# Altium PCB LedDimming_V2_SMD_Only.PcbDoc
Units mm, origin at the board's own origin, x right, y up, seen from the top; angles counter-clockwise.
Board outline 47.75 x 10.16 mm, 2 copper layers (Top Layer, Bottom Layer); 21 components, 17 nets, 59 pads, 8 vias.
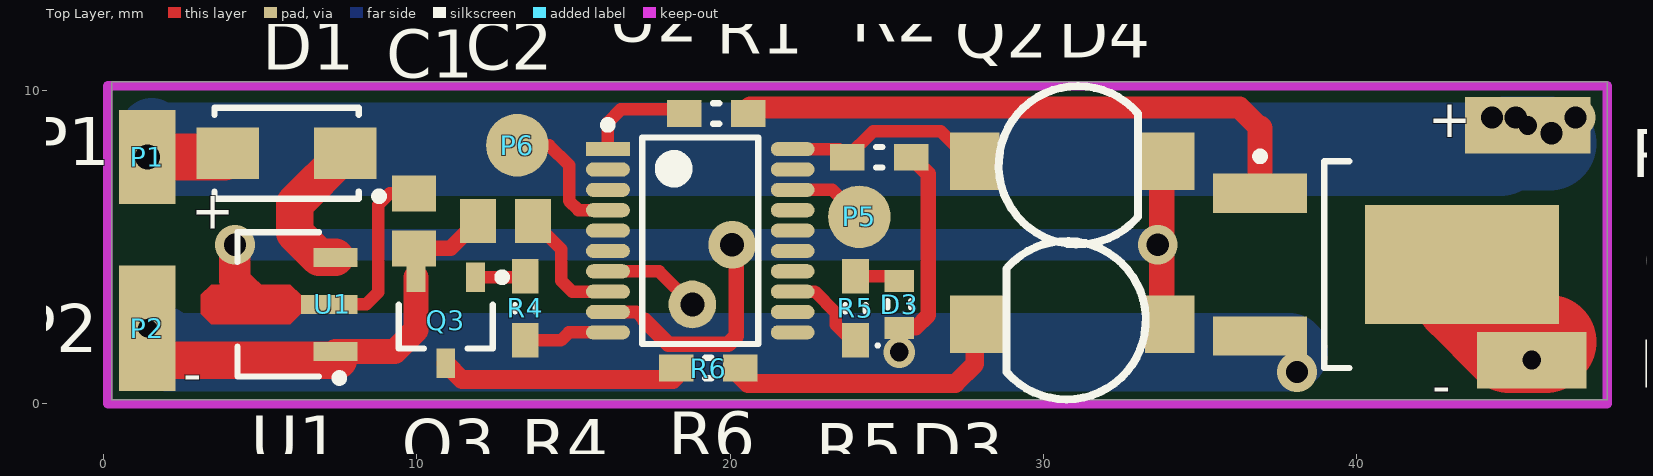
[diagram p0: Top Layer view]
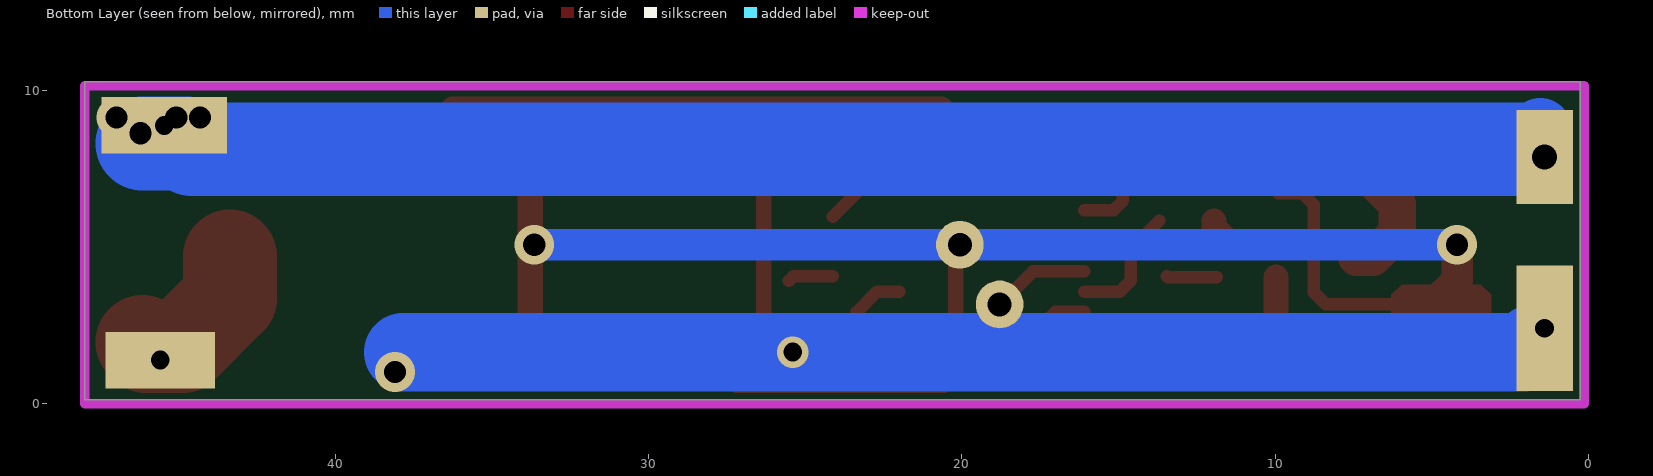
[diagram p1: Bottom Layer view, seen from below]

## Layer stack, top to bottom
Top Solder: solder mask 0.0102, Solder Resist, Dk 3.5
Top Layer: signal copper 0.0356
Dielectric 1: dielectric 0.32, FR-4, Dk 4.8
Bottom Layer: signal copper 0.0356
Bottom Solder: solder mask 0.0102, Solder Resist, Dk 3.5

## Board outline
0.254,0.127 48.006,0.127 48.006,10.287 0.254,10.287

## Design rules (kind name [scope] priority, off if disabled: settings)
Clearance [All] p1: gap=0.2 ignorepadtopadclearanceinfootprint=FALSE
PolygonConnect [All] p1: connectstyle=Relief reliefconductorwidth=0.254 reliefentries=4 polygonreliefangle="90 Angle" airgapwidth=0.254
RoutingVias [All] p1: holewidth=0.4 width=8 viastyle="Through Hole" minholewidth=0.711 minwidth=1.27 maxholewidth=0.711 maxwidth=1.27
SolderMaskExpansion [All] p1: expansion=0.102
Width [All] p1: maxlimit=4 minlimit=0.4 preferedwidth=0.5
30 further rules are at their usual default settings.

## Components (designator, comment, footprint, x,y, rotation, side; value= is the part's Value field where it differs from the comment)
C1 "106" CAPC2012X12N 9.906,5.842 r90 top
C2 "104" CAPC2012X12N 12.827,5.842 r0 top
D1 "1N4007" SODFL504X244-2N 5.842,8.001 r180 top
D3 "LED0603" DIOC1608X06N 25.4,3.175 r90 top
D4 "LED IR 3mm" "LED_IR_3mm-SMD- Modifire" 32.258,2.667 r180 top
P1 "P" Point#1 1.397,7.874 r0 top
P2 "P" Point#2 1.397,2.413 r0 top
P3 "P" Point#3 45.593,1.397 r0 top
P4 "P" Point#4 45.466,8.89 r0 top
P5 "P" Point#5 24.13,5.969 r0 top
P6 "P" Point#5 13.208,8.255 r0 top
Q1 "AOD424" DPAK228P991X229-3N_TO252 41.021,4.445 r0 top
Q2 "LED IR 3mm" "LED_IR_3mm-SMD- Modifire" 29.591,7.62 r0 top
Q3 "C1815" SOT95P278X125-3N 10.922,2.667 r270 top
R1 "470R" RESC2608X06N_0603 19.558,9.271 r180 top
R2 "10K" RESC2608X06N_0603 24.765,7.874 r180 top
R4 "1K" RESC2608X06N_0603 13.462,3.048 r90 top
R5 "1K" RESC2608X06N_0603 24.003,3.048 r270 top
R6 "100R" RESC2608X06N_0603 19.304,1.143 r0 top
U1 "CJA1117B-5.0 SOT89" SOT89-150P409X160-3N 5.599,3.175 r180 top
U2 "STM8S003" TSOP65P640X120-20N 19.05,5.207 r0 top value=STM8S003F3

## Footprints (in the part's own frame and the unit in brackets; to place one, negate y for a bottom-side part, rotate by r counter-clockwise, add the part's x,y. Pads: shape width x height; smd on the part's side, far side on the other; paste and mask are expansions set on the pad)
CAPC2012X12N [mm] "Chip Capacitor, 2-Leads, Body 2.00x1.25mm, IPC Medium Density"
  rect 1.15x1.4 smd: 1(-0.875,0) 2(0.875,0)
  body extent -1.1,-0.67 1.1,0.67, height 1.2
DIOC1608X06N [mm] "Chip Diode, 2-Leads, Body 1.60x0.80mm, IPC Medium Density"
  rect 0.7x0.95 smd: 1(-0.75,0) 2(0.75,0)
  silkscreen extent -1.36,-0.38 0.1,0.74, body extent -0.9,-0.4 0.9,0.4, height 0.6
DPAK228P991X229-3N_TO252 [mm] "D-PAK, 3-Pads, Body 6.15x6.65mm (max), IPC Medium Density"
  rect 3x1.25 smd: 1(-4.1,2.28) 3(-4.1,-2.28)
  rect 6.2x3.8 smd: 4(2.35,0)
  silkscreen extent -4.22,-3.3 -1.25,3.58, body extent -2.05,-3.3 4.05,3.3, height 2.29
"LED_IR_3mm-SMD- Modifire" [mil] "IR Transmitter and Receiver Led"
  rect 71.81x71.81 smd: 1(170,5)
  rect 62.3x71.81 smd: 2(-70,5)
  silkscreen extent -40,-100 135,100
Point#1 [mm]
  rect 1.8x3 hole 0.8: 1(0,0)
Point#2 [mm]
  rect 1.8x4 hole 0.6: 1(0,0)
Point#3 [mm]
  rect 3.5x1.8 hole 0.6: 1(0,0)
Point#4 [mm]
  rect 4x1.8 hole 0.6: 1(0,0)
Point#5 [mm]
  round 2 smd: 1(0,0)
RESC2608X06N_0603 [mm] "Chip Resistor, 2-Leads, Body 2.60x0.80mm, IPC Medium Density"
  rect 1.1x0.85 smd: 1(-1.025,0) 2(1.025,0)
  silkscreen extent -0.1,-0.33 0.1,0.33, body extent -1.3,-0.4 1.3,0.4, height 0.6
SODFL504X244-2N [mm] "SODFL, 2-Leads, Body 2.70x5.04mm, IPC Medium Density"
  rect 2x1.65 smd: 1(-1.875,0) 2(1.875,0)
  silkscreen extent -3.08,-1.45 2.3,1.5, body extent -2.3,-1.45 2.3,1.45, height 2.44
SOT89-150P409X160-3N [mm] "SOT89, 3-Leads, Body 4.50x2.45mm, Pitch 1.50mm, Lead Span 4.1mm, IPC Medium Density"
  rect 1.4x0.6 smd: 1(-1.8,1.5) 3(-1.8,-1.5)
  rect 1.8x0.6 smd: 2(-1.6,0)
  Top Layer region: -0.7,0.3 -0.365,0.635 2.165,0.635 2.5,0.3 2.5,-0.3 2.165,-0.635 -0.365,-0.635 -0.7,-0.3
  silkscreen extent -2.05,-2.3 1.32,2.47, body extent -1.28,-2.3 1.32,2.3, height 1.6
SOT95P278X125-3N [mm] "SOT23, 3-Leads, Body 2.92x2.78mm, Pitch 0.95mm, IPC Medium Density"
  rect 0.95x0.6 smd: 1(-1.375,0.95) 2(-1.375,-0.95) 3(1.375,0)
  silkscreen extent -1.5,-1.5 0.9,1.93, body extent -0.9,-1.52 0.9,1.52, height 1.25
TSOP65P640X120-20N [mm] "TSOP, 20-Leads, Body 6.50x4.40mm, Pitch 0.65mm, IPC Medium Density"
  rect 1.4x0.45 smd: 1(-2.95,2.925)
  oval 1.4x0.45 smd: 2(-2.95,2.275) 3(-2.95,1.625) 4(-2.95,0.975) 5(-2.95,0.325) 6(-2.95,-0.325) 7(-2.95,-0.975) 8(-2.95,-1.625) 9(-2.95,-2.275) 10(-2.95,-2.925) 11(2.95,-2.925) 12(2.95,-2.275) 13(2.95,-1.625) 14(2.95,-0.975) 15(2.95,-0.325) 16(2.95,0.325) 17(2.95,0.975) 18(2.95,1.625) 19(2.95,2.275) 20(2.95,2.925)
  silkscreen extent -3.07,-3.3 1.85,3.82, body extent -3.2,-3.3 3.2,3.3, height 1.2

## Part data
C1: library part "Capacitor 106"
C2: library part "Capacitor 104 0603"
D1: library part "1N4007_SMD Diode", "1N4007_SMD"
P1 P2 P3 P4 P5 P6: library part Point
Q1: library part "AOD424 20V N-Channel MOSFET", "AOD424 20V N-Channel MOSFET"
Q3: library part "Transitor C1815 NPN", "SOT-23 Plastic-Encapsulate Transistors"
R1: library part R470_0603_5%, "Thick Film Resistors - SMD 470 ohm 5%", Supplier Part Number 1=CR0603-JW-471ELFCT-ND, Supplier 1=Digi-Key
R2: library part R10k_0603_5%, "RES SMD 10K OHM 1% 1/4W 0603", Supplier Part Number 1=541-10.0KSCT-ND, Supplier 1=Digi-Key
R4 R5: library part 1k_0603_5%, "Thick Film Resistors - SMD 0603 1kOHMS 5% 1/10WATT", Supplier Part Number 1=CR0603-JW-101ELFCT-ND, Supplier 1=Digi-Key
R6: library part R100_0603_5%, "Thick Film Resistors - SMD 0603 100OHMS 5% 1/10WATT", Supplier Part Number 1=CR0603-JW-101ELFCT-ND, Supplier 1=Digi-Key
U1: "CJA1117B-5.0 SOT89 Power IC 1A 5V_IC"
U2: "MCU 8-bit STM8S STM8 CISC 8KB Flash 3.3V/5V 20-Pin TSSOP T/R", Supplier Part Number 1=497-18051-1-ND

## Free pads (board coordinates)
  round 1.524 hole 0.762: 2(20.066,5.08) 3(18.796,3.175)

## Via types
v1: diameter 1.27, hole 0.711, Top Layer to Bottom Layer, 7 vias
v2: diameter 1, hole 0.6, Top Layer to Bottom Layer, 1 vias

## Nets (pads, with @x,y where several pads share a name; then routed paths per layer and width w, separated by ;. In a path a pad name is that pad's centre, name@x,y a point inside that pad or via, vN(x,y) a via of type N, cw(c..) or ccw(c..) an arc to the next point about the centre after c; other vN are vias at no path point)
GND: C1.1 C2.1 D3.1 P2.1 pad.3 Q1.3 Q3.2 R2.1 U1.1 U2.7 | length 59.8
  Top Layer w0.4: U2.7 17.739,4.232 pad.3 ; v2(25.4,1.651) D3.1
  Top Layer w0.5: C1.1 11.077,4.967 C2.1 ; D3.1 25.92,2.425 26.325,2.83 26.325,7.339 R2.1
  Top Layer w0.8: U1.1 9.295,1.675 9.972,2.352 Q3.2 ; C2.1@11.952,5.602 C2.1
  Top Layer w1.2: P2.1@1.535,1.905 2.043,1.397 U1.1@7.493,1.397
  Bottom Layer w2.5: P2.1@1.789,1.905 2.043,1.651 v2(25.4,1.651) 37.846,1.651
  other v1: 38.1,1.016
NetC2_2: C2.2 U2.8 | length 3.9
  Top Layer w0.4: C2.2 14.605,4.939 14.605,3.937 14.96,3.582 U2.8
NetD1_1: D1.1 U1.3 | length 4.9
  Top Layer w1.2: U1.3 6.882,4.675 6.096,5.461 6.096,6.38 D1.1 D1.1@7.728,8.012
NetD3_2: D3.2 R5.1 | length 1.5
  Top Layer w0.4: R5.1@24.13,4.073 25.379,4.073 D3.2@25.527,3.925
NetD4_1: D4.1 R6.2 | length 9.1
  Top Layer w0.6: R6.2@20.329,0.889 20.568,0.65 27.193,0.65 27.813,1.27 D4.1@27.813,2.54
NetP3_1: P3.1 Q1.4 | length 4.8
  Top Layer w3: Q1.4@43.371,4.699 Q1.4 43.371,3.365 44.886,1.85 46.029,1.85 P3.1@46.156,1.977
NetQ1_1: Q1.1 R1.1 | length 18.2
  Top Layer w0.7: R1.1@20.583,9.398 20.645,9.46 36.26,9.46 36.921,8.799
  Top Layer w0.8: Q1.1@36.921,7.233 36.921,8.799
NetQ2_2: Q2.2 R2.2 U2.20 | length 6.5
  Top Layer w0.4: U2.20 23.482,8.132 R2.2 24.576,8.71 26.723,8.71 Q2.2@27.686,7.747
NetQ3_1: Q3.1 R4.2 | length 1.6
  Top Layer w0.4: Q3.1 13.431,4.042 R4.2
NetQ3_3: Q3.3 R6.1 | length 7.6
  Top Layer w0.6: Q3.3 11.437,0.777 18.167,0.777 R6.1@18.279,0.889
NetR1_2: R1.2 U2.1 | length 3.5
  Top Layer w0.4: U2.1 16.1,8.988 16.51,9.398 R1.2@18.533,9.398
NetR4_1: R4.1 U2.10 | length 2.7
  Top Layer w0.4: R4.1 14.596,2.023 14.855,2.282 U2.10
NetR5_2: R5.2 U2.13 | length 2.8
  Top Layer w0.4: U2.13 22.709,3.582 23.368,2.923 23.368,2.531 R5.2@23.876,2.023
RESET: P6.1 U2.4 | length 4.4
  Top Layer w0.4: P6.1 14.224,8.255 14.859,7.62 14.859,6.477 15.154,6.182 U2.4
SWIM: P5.1 U2.18 | length 2.5
  Top Layer w0.4: U2.18 23.267,6.832 P5.1
VCC_5V: C1.2 D4.2 pad.2 Q2.1 U1.2 U2.9 | length 52.6
  Top Layer w0.4: 4.953,3.175 U1.2 8.382,3.175 8.763,3.556 8.763,6.35 9.13,6.717 C1.2 ; U2.9 17.007,2.932 17.272,2.667
  Top Layer w0.5: 17.272,2.667 18.034,1.905 19.939,1.905 20.193,2.159 20.193,4.953 pad.2
  Top Layer w0.8: Q2.1@33.782,7.747 33.782,2.667 D4.2@33.909,2.54
  Top Layer w1: v1(4.191,5.08) 4.191,3.937 4.953,3.175
  Bottom Layer w1: v1(4.191,5.08) pad.2 v1(33.655,5.08)
VCC_12V: D1.2 P1.1 P4.1 | length 47.6
  Top Layer w1.5: P1.1 3.84,7.874 D1.2
  Bottom Layer w2: P1.1@1.535,8.763 P1.1@2.17,8.128
  Bottom Layer w3: P1.1@2.17,8.128 44.577,8.128 44.759,8.31 P4.1@46.156,8.31
  other v1: 46.228,8.636 44.323,9.144 45.085,9.144 46.99,9.144
pads on no net: U2.2 U2.3 U2.5 U2.6 U2.11 U2.12 U2.14 U2.15 U2.16 U2.17 U2.19

## Keep-outs
Keep-Out Layer:
  lines w0.3: 0.127,0 48.006,0 48.006,10.16 0.127,10.16 0.127,0

## Silkscreen, mask and mechanical layers (free items; w line width, h text height)
Top Overlay:
  text "+" at 42.291,8.509 h1.2
  text "+" at 2.794,5.588 h1.2
  text "-" at 2.54,0.381 h1.2
  text "-" at 42.418,0 h1.2
Bottom Solder:
  lines w2: 1.397,7.874 43.815,7.874 ; 2.286,2.413 2.794,1.905 36.83,1.905

## Dimensions
0.127,0 to 48.006,0 on Mechanical 1
0.127,0 to 0.127,10.16 on Mechanical 1